# Allegro board EmberMain.brd
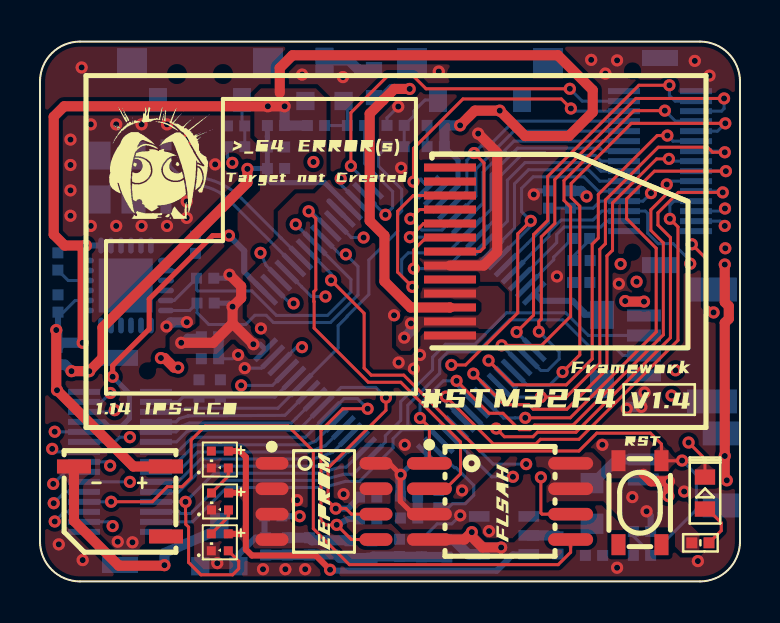
[diagram p0: board, top side]
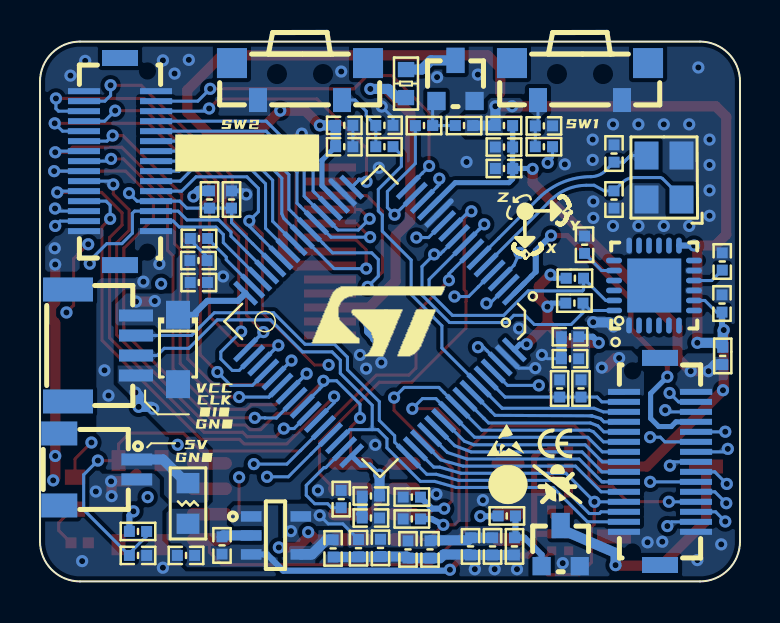
[diagram p1: board, bottom side, seen from below]

Outline 35 x 27 mm; copper layers: TOP, GND, VCC, BOTTOM. Coordinates in mm from the lower left corner of the outline.
Outline path: 0,25 0,2 arc(0.59,0.59) 2,0 33,0 arc(34.41,0.59) 35,2 35,25 arc(34.41,26.41) 33,27 2,27 arc(0.59,26.41) 0,25

## Design rules (mm)
constraint set DEFAULT: min track width 0.152

## Placement (name value [footprint] x y rotation side)
B1  BUZZER  [BUZZER_5X5]  4 4 180 top
C1  0.1uF  [C0402]  25.9 1.8 270 bottom
C2  2.2uF  [C0402]  27.7 1.3 180 bottom
C3  0.1uF  [C0402]  20.35 1.65 90 bottom
C4  2.2uF  [C0402]  19.07 1.66 90 bottom
C5  0.1uF  [C0402]  17.97 1.68 90 bottom
C6  2.2uF  [C0402]  12.37 1.75 90 bottom
C7  0.1uF  [C0402]  13.47 1.75 90 bottom
C8  2.2uF  [C0402]  16.6 1.6 90 bottom
C9  0.1uF  [C0402]  15.5 1.6 90 bottom
C12  20pF  [C0402]  6.3 19.1 90 bottom
C13  20pF  [C0402]  6.3 21.4 270 bottom
C14  2.2uF  [C0402]  18.45 4.27 180 bottom
C15  0.1uF  [C0402]  27.06 14.95 0 bottom
C16  2.2uF  [C0402]  19.79 22.81 0 bottom
C17  0.1uF  [C0402]  18.45 3.17 180 bottom
C18  2.2uF  [C0402]  27.08 16.05 0 bottom
C19  0.1uF  [C0402]  8.5 11.14 180 bottom
C20  2.2uF  [C0402]  8.5 12.24 180 bottom
C21  0.1uF  [C0402]  19.79 21.74 0 bottom
C23  0.1uF  [C0402]  30.1 1.3 180 bottom
C24  0.1uF  [C0402]  7.77 16.84 270 bottom
C25  0.1uF  [C0402]  0.89 16 90 bottom
C26  0.1uF  [C0402]  0.9 13.9 90 bottom
C27  2.2uF  [C0402]  11.8 20.65 180 bottom
C28  0.1uF  [C0402]  11.8 21.73 180 bottom
C29  0.1uF  [C0402]  9.8 22.78 180 bottom
C30  0.1uF  [C0402]  17.78 22.81 180 bottom
C31  2.2uF  [C0402]  27.05 17.15 180 bottom
C32  2.2uF  [C0402]  19.94 4.12 270 bottom
D1  DSK34  [SOD-123FL]  28.1 11.6 270 bottom
D2  Green  [LED0603]  33.25 4.42 90 top
F1  BSMD0805-100-6V  [R0805]  27.6 3.9 270 bottom
FB1  0R  [R0402]  11.8 22.8 0 bottom
FB2  0R  [R0402]  0.86 11.28 90 bottom
J1  1.0 4P SMD  [CON_1-4P-SMD]  31.9 11.8 270 bottom
J2  1.0 2P SMD  [CON_1-2P-SMD]  32.1 5.6 270 bottom
J3  B2B 30P  [B2B-0_5MM-30P]  4 6 270 bottom
J4  B2B 30P  [B2B-0_5MM-30P]  31 21 90 bottom
NOREF  -  []  14.03 20.47 0 top
NOREF#2  -  []  -5.91 4.03 0 top
NOREF#3  -  []  37.49 3.93 0 top
NOREF#4  -  []  26.65 8.41 0 top
NOREF#5  -  []  5.74 21.55 0 top
NOREF#6  -  []  9.25 16.76 0 top
NOREF#7  -  []  -3.82 16.95 0 top
NOREF#8  -  []  13.28 -2.21 0 top
NOREF#9  -  []  7.87 22.77 0 top
NOREF#10  -  []  21.92 22.74 0 top
NOREF#11  -  []  37.91 8.04 0 top
NOREF#12  -  []  -3.43 6.26 0 top
NOREF#13  -  []  29.54 10.71 0 top
NOREF#14  -  []  36.88 7.27 0 top
NOREF#15  -  []  23.75 -2.78 0 top
NOREF#16  -  []  23.84 9.1 0 top
NOREF#17  -  []  39.66 7.12 0 top
NOREF#18  -  []  39.72 4.75 0 top
NOREF#19  -  []  37.56 9.18 0 top
NOREF#20  -  []  38.02 7.14 0 top
NOREF#21  -  []  8.25 18.26 0 top
NOREF#22  -  []  37.83 8.82 0 top
NOREF#23  -  []  14.02 22.05 0 top
NOREF#24  -  []  24.84 26.82 0 top
NOREF#25  -  []  11.72 19.39 0 top
NOREF#26  -  []  6.34 8.65 0 top
NOREF#27  -  []  17.97 12.92 0 top
Q2  AO3402A  [SOT-23]  8.97 1.75 180 bottom
Q3  SS8050  [SOT-23]  14.22 25.02 180 bottom
R1  10R  [R0402]  11.66 3.28 0 bottom
R2  10K  [R0402]  11.28 1.75 90 bottom
R3  4.7K  [R0402]  16.41 4.22 0 bottom
R4  4.7K  [R0402]  16.41 3.12 0 bottom
R5  1K  [R0402]  15.8 22.8 180 bottom
R6  10K  [R0402]  13.8 22.8 0 bottom
R7  10R  [R0603]  16.7 24.9 270 bottom
R8  470R  [R0402]  33.02 1.93 0 top
R9  4.7K(NC)  [R0402]  7.95 9.65 270 bottom
R10  4.7K  [R0402]  9.02 9.65 270 bottom
R11  1K  [R0402]  30.1 2.5 180 bottom
R12  4.7K(NC)  [R0402]  26.52 19.1 270 bottom
R13  4.7K  [R0402]  25.42 19.1 270 bottom
R14  1K  [R0402]  9.8 21.74 0 bottom
R15  1K  [R0402]  17.78 21.74 0 bottom
R16  4.7K  [R0402]  8.28 13.92 0 bottom
R17  4.7K  [R0402]  8.26 15.16 0 bottom
RGB1  WS2812  [RGB1010]  8.99 1.96 0 top
RGB2  WS2812  [RGB1010]  9 4 0 top
RGB3  WS2812  [RGB1010]  8.99 6.1 0 top
S1  K1  [KEY_SMD_3X6]  8 25 180 bottom
S2  K2  [KEY_SMD_3X6]  22 25 180 bottom
S4  KEY-SMD  [KEY_SMD_3X4X2_5]  30 3.94 270 top
U1  AT24C64  [SOP-8]  14.2 4 0 top
U3  TPLP2992IM5X-3.3  [SOT23-5]  23.2 2.3 270 bottom
U4  W25Q128JVSIM  [SOIC-8-208]  23 4 270 top
U5  LCD  [TFT-LCD_13P]  20.5 16.5 180 top
U6  MPU6050  [QFN24-EP-4X4]  4.3 14.8 180 bottom
U7  STM32F405RGT6  [LQFP_64]  18 13 315 bottom
Y1  25Mhz  [CRYSTAL_SMD3225-4P]  3.8 20.2 90 bottom

## Library data of the parts
B1 = BUZZER_NS
C1-C9 C12-C21 C23-C32 = C
D1 = DIODE SCHOTTKY
D2 = LED
F1 = FUSE
FB1 FB2 = L
J1 = CON_6
J2 = CON_4
J3 J4 = CON_2X16
Q2 = MOSFET-N
Q3 = Triode-NPN
R1-R17 = R
RGB1-RGB3 = WS2812
S1 S2 = KEY-SMD-4
S4 = KEY-SMD-4: Tolerance: .TOL; User Part Number: E10S007
U1 = AT24C256C
U3 = TPLP2992IM5X-3.3
U4 = W25Qxxx
U5 = 1.14 TFT-LCD_13P
U6 = MPU6050
U7 = STM32F405RxTx_64
Y1 = CRYSTAL_F

## Footprints (pads in the part's own frame, mm; a bottom-side part is the same pattern mirrored in y, then rotated)
B2B-0_5MM-30P
  rect 0.3x1.6 smd: 1(-3.48,-1.801) 2(-3.48,1.801) 3(-2.979,-1.801) 4(-2.979,1.801) 5(-2.479,-1.801) 6(-2.479,1.801) 7(-1.981,-1.801) 8(-1.981,1.801) 9(-1.481,-1.801) 10(-1.481,1.801) 11(-0.98,-1.801) 12(-0.98,1.801) 13(-0.48,-1.801) 14(-0.48,1.801) 15(0.02,-1.801) 16(0.02,1.801) 17(0.521,-1.801) 18(0.521,1.801) 19(1.021,-1.801) 20(1.021,1.801) 21(1.519,-1.801) 22(1.519,1.801) 23(2.019,-1.801) 24(2.019,1.801) 25(2.52,-1.801) 26(2.52,1.801) 27(3.02,-1.801) 28(3.02,1.801) 29(3.52,-1.801) 30(3.52,1.801)
  rect 0.8x1.801 smd: 31(5.179,0) 32(-5.179,0)
BUZZER_5X5
  rect 1.699x0.701 smd: 1(-2.301,-1.75) 2(2.301,-1.75) 3(-2.301,1.75)
C0402
  rect 0.549x0.549 smd: 1(-0.432,0) 2(0.432,0)
CON_1-2P-SMD
  rect 0.599x1.549 smd: 1(-0.5,1.938) 2(0.5,1.938)
  rect 1.199x1.801 smd: 3(1.801,-1.938) 4(-1.801,-1.938)
CON_1-4P-SMD
  rect 0.599x1.699 smd: 1(-1.501,1.699) 2(-0.5,1.699) 3(0.5,1.699) 4(1.499,1.699)
  rect 1.199x2.499 smd: 5(2.799,-1.699) 6(-2.799,-1.699)
CRYSTAL_SMD3225-4P
  rect 1.399x1.199 smd: 1(-1.1,-0.874) 2(1.1,-0.874) 3(1.1,0.874) 4(-1.1,0.874)
KEY_SMD_3X4X2_5
  rect 1.05x0.7 smd: 1(-2.1,1.075) 2(-2.1,-1.075) 3(2.1,1.075) 4(2.1,-1.075)
KEY_SMD_3X6
  rect 0.899x1.199 smd: 1(-2.101,-0.925) 2(2.101,-0.925)
  rect 1.501x1.501 smd: 3(-3.401,0.925) 4(3.401,0.925)
LED0603
  rect 0.762x1.016 smd: 1(-0.8,0) 2(0.8,0)
LQFP_64
  rect 1.524x0.254 smd: 1(-5.75,3.75) 2(-5.75,3.25) 3(-5.75,2.75) 4(-5.75,2.25) 5(-5.75,1.75) 6(-5.75,1.25) 7(-5.75,0.75) 8(-5.75,0.25) 9(-5.75,-0.25) 10(-5.75,-0.75) 11(-5.75,-1.25) 12(-5.75,-1.75) 13(-5.75,-2.25) 14(-5.75,-2.75) 15(-5.75,-3.25) 16(-5.75,-3.75) 33(5.75,-3.75) 34(5.75,-3.25) 35(5.75,-2.75) 36(5.75,-2.25) 37(5.75,-1.75) 38(5.75,-1.25) 39(5.75,-0.75) 40(5.75,-0.25) 41(5.75,0.25) 42(5.75,0.75) 43(5.75,1.25) 44(5.75,1.75) 45(5.75,2.25) 46(5.75,2.75) 47(5.75,3.25) 48(5.75,3.75)
  rect 0.254x1.524 smd: 17(-3.75,-5.75) 18(-3.25,-5.75) 19(-2.75,-5.75) 20(-2.25,-5.75) 21(-1.75,-5.75) 22(-1.25,-5.75) 23(-0.75,-5.75) 24(-0.25,-5.75) 25(0.25,-5.75) 26(0.75,-5.75) 27(1.25,-5.75) 28(1.75,-5.75) 29(2.25,-5.75) 30(2.75,-5.75) 31(3.25,-5.75) 32(3.75,-5.75) 49(3.75,5.75) 50(3.25,5.75) 51(2.75,5.75) 52(2.25,5.75) 53(1.75,5.75) 54(1.25,5.75) 55(0.75,5.75) 56(0.25,5.75) 57(-0.25,5.75) 58(-0.75,5.75) 59(-1.25,5.75) 60(-1.75,5.75) 61(-2.25,5.75) 62(-2.75,5.75) 63(-3.25,5.75) 64(-3.75,5.75)
QFN24-EP-4X4
  oval 0.279x0.8 smd: 1(-1.25,-1.999) 2(-0.749,-1.999) 3(-0.249,-1.999) 4(0.249,-1.999) 5(0.749,-1.999) 6(1.25,-1.999) 13(1.25,1.999) 14(0.749,1.999) 15(0.249,1.999) 16(-0.249,1.999) 17(-0.749,1.999) 18(-1.242,1.999)
  oval 0.8x0.279 smd: 7(1.999,-1.25) 8(1.999,-0.749) 9(1.999,-0.249) 10(1.999,0.249) 11(1.999,0.749) 12(1.999,1.25) 19(-1.999,1.25) 20(-1.999,0.749) 21(-1.999,0.249) 22(-1.999,-0.249) 23(-1.999,-0.749) 24(-1.999,-1.25)
  rect 2.7x2.7 smd: 25(0.013,0)
R0402
  rect 0.549x0.549 smd: 1(-0.432,0) 2(0.432,0)
R0603
  rect 0.762x0.813 smd: 1(-0.701,0) 2(0.701,0)
R0805
  rect 1.016x1.143 smd: 1(-1.016,0) 2(1.016,0)
RGB1010
  rect 0.45x0.45 smd: 1(0.424,0.424) 2(-0.424,0.424) 3(-0.424,-0.424) 4(0.424,-0.424)
SOD-123FL
  rect 1.399x1.199 smd: 1(1.735,0) 2(-1.735,0)
SOIC-8-208
  oval 0.63x2.25 smd: 1(-1.905,-3.531) 2(-0.635,-3.531) 3(0.635,-3.531) 4(1.905,-3.531) 5(1.905,3.531) 6(0.635,3.531) 7(-0.635,3.531) 8(-1.905,3.531)
SOP-8
  oval 1.651x0.635 smd: 1(-2.601,1.905) 2(-2.601,0.635) 3(-2.601,-0.635) 4(-2.601,-1.905) 5(2.601,-1.905) 6(2.601,-0.635) 7(2.601,0.635) 8(2.601,1.905)
SOT23-5
  rect 0.531x1.031 smd: 1(-0.95,-1.239) 2(0,-1.239) 3(0.95,-1.239) 4(0.95,1.239) 5(-0.95,1.239)
SOT-23
  rect 0.914x0.914 smd: 1(-0.953,-0.991) 2(0.953,-0.991)
  rect 0.914x1.27 smd: 3(0,1.041)
TFT-LCD_13P
  rect 2.601x0.401 smd: 1(0,-4.201) 2(0,-3.5) 3(0,-2.799) 4(0,-2.101) 5(0,-1.399) 6(0,-0.701) 7(0,0) 8(0,0.701) 9(0,1.399) 10(0,2.101) 11(0,2.799) 12(0,3.5) 13(0,4.201)

## Nets
5V: F1.1 J2.1 J3.1 J4.1
5V_F: C1.2 C2.2 F1.2 RGB1.1 RGB2.1 RGB3.1 U3.1 U3.3
GND: C1.1 C2.1 C3.1 C4.1 C5.1 C6.1 C7.1 C8.1 C9.1 C12.1 C13.1 C14.1 C15.1 C16.1 C17.1 C18.1 C19.1 C20.1 C21.1 C23.2 C24.1 C25.2 C26.2 C27.1 C28.1 C29.2 C30.2 C31.1 C32.1 D1.1 J1.4 J2.2 J3.29 J3.30 J4.29 J4.30 Q2.2(S) Q3.2(E) R2.1 R10.1 R13.1 RGB1.3(VSS) RGB2.3(VSS) RGB3.3(VSS) S1.2 S2.1 S4.2 U1.1 U1.2 U1.3 U1.4 U1.7(WP) U3.2 U4.4 U5.8 U5.13 U6.1 U6.9 U6.11 U6.18 U7.12(VSSA) U7.18 U7.63 Y1.2 Y1.4
VBAT: J3.8 U7.1
VCC3V3: B1.1 C4.2 C5.2 C6.2 C7.2 C8.2 C9.2 C14.2 C15.2 C16.2 C17.2 C18.2 C19.2 C20.2 C21.2 C26.1 D1.2 FB1.2 FB2.2 J1.1 J4.2 R3.2 R4.2 R6.1 R8.1 R9.1 R11.1 R12.1 R16.2 R17.2 U1.8 U3.5(VOUT) U4.3(WP#(IO2)) U4.7 U4.8 U5.10(VCC) U5.12 U6.8(VLOGIC) U6.13 U7.19 U7.32 U7.48 U7.64
BEEP: J4.9 R1.2 U7.27
BOOT0: J3.3 R9.2 R10.2 U7.60
IIC1_SCL: J3.18 R17.1 U6.23 U7.8
IIC1_SDA: J3.20 R16.1 U6.24 U7.9
IIC2_SCL: J3.11 R3.1 U1.6 U7.56
IIC2_SDA: J3.13 R4.1 U1.5 U7.55
KEY1: J3.10 R14.1 U7.2
KEY2: J3.5 R15.1 U7.59
NRST: C23.1 J3.16 R11.2 S4.1 U7.7
OSCIN: C12.2 U7.5 Y1.1
OSCOUT: C13.2 U7.6 Y1.3
PA0: J3.26 U7.14
PA1: J3.28 R5.1 U7.15
PA2: J4.27 U7.16
PA3: J4.25 U7.17
PA4: J4.23 U5.7 U7.20
PA5: J4.21 U5.4 U7.21
PA6: J4.19 U5.5 U7.22
PA7: J4.17 U5.3 U7.23
PA8: J4.12 U4.1 U7.41
PA9: J4.10 U7.42
PA10: J4.8 U7.43
PA11: J4.6 U7.44
PA12: J4.4 U7.45
PA13: J1.3 J3.27 U7.46
PA14: J1.2 J3.25 U7.49
PA15: J3.23 RGB1.4 U7.50
PB0: J4.11 U7.26
PB2: D2.2(CATHODE) J4.7 R12.2 R13.2 U7.28
PB5: J3.9 U7.57
PB6: J3.7 U7.58
PB8: J3.4 U7.61
PB9: J3.6 U7.62
PB10: J4.5 U4.6 U7.29
PB11: J4.3 U7.30
PB12: J4.28 U7.33
PB13: J4.26 U7.34
PB14: J4.24 U7.35
PB15: J4.22 U7.36
PC2: J3.22 U4.2 U7.10
PC3: J3.24 U4.5 U7.11
PC4: J4.15 U5.6 U7.24
PC5: J4.13 U7.25
PC6: J4.20 U7.37
PC7: J4.18 U7.38
PC8: J4.16 U7.39
PC9: J4.14 U7.40
PC10: J3.21 U7.51
PC11: J3.19 U7.52
PC12: J3.17 U7.53
PC14: J3.12 U7.3
PC15: J3.14 U7.4
PD2: J3.15 U7.54
TFT_LEDK: R7.2 U5.11
VREF: C27.2 C28.2 FB1.1 FB2.1 J3.2 U7.13
N790000: C3.2 U3.4
N791178: Q2.1 R1.1 R2.2
N791348: B1.2 Q2.3
N798251: Q3.1 R5.2 R6.2
N799665: RGB1.2 RGB2.4
N799734: RGB2.2 RGB3.4
N800609: D2.1 R8.2
N818576: C24.2 U6.20
N819365: C25.1 U6.10
N839751: C29.1 R14.2 S1.1
N839755: C30.1 R15.2 S2.2
N848388: Q3.3 R7.1
N871638: C31.2 U7.31
N871692: C32.2 U7.47

Pads without a net: B1 3; J1 5 6; J2 3 4; J3 31 32; J4 31 32; RGB3 2; S1 3 4; S2 3 4; S4 3 4; U5 1 2 9; U6 2 3 4 5 6 7 12 14 15 16 17 19 21 22 25

## Via types
v1: diameter 0.61, hole 0.305, TOP to BOTTOM, 181 vias

## Routing (per net, layer and track width the routed paths; a pad name or vN(x,y) marks a point on that pad's centre or on a via; arc(x,y) is an arc through that point)
5V: length 47.3
  TOP w0.508: v1(6.05,11.17) 6.23,11.17 6.71,10.69 v1(6.91,10.69)
  VCC w0.254: 31.63,12.3 31.54,12.3
  VCC w0.508: v1(31.58,9.3) 31.58,10.37 31.77,10.56 ; 31.77,10.56 31.63,10.7 31.63,14.48 31.12,14.99 v1(29.83,14.99) 29.83,15.08 v1(29.03,15.88) 27.71,17.2 23.98,17.2 18.19,22.99 14.06,22.99 5.56,14.49 5.56,11.66 v1(6.05,11.17) ; 31.77,10.56 v1(31.78,10.56)
  BOTTOM w0.254: 6.38,9.48 J3.1 ; 30.64,6.1 J2.1
  BOTTOM w0.508: F1.1 27.66,4.92 28.85,6.1 J2.1
5V_F: length 22.3
  TOP w0.305: RGB3.1 9.99,6.52 10.29,6.22 10.29,4.44 ; RGB2.1 9.44,4.44 10.29,4.44 ; 10.29,4.44 10.29,2.38 ; 10.29,2.38 10.29,1.6 10.6,1.3 13.79,1.3 v1(14.5,0.58) ; 10.29,2.38 RGB1.1
  BOTTOM w0.305: v1(14.5,0.58) 14.55,0.54 22.84,0.54 23.37,1.07 23.37,1.07 23.64,1.35 U3.3
GND: length 77.7
  TOP w0.508: v1(31.42,4.27) 31.42,4.98 v1(31.45,5) 30.56,5 30.18,5.38 ; v1(21.91,22.4) 22.86,21.45 22.86,16.48 22.18,15.8 U5.8 ; v1(23.06,1.7) 22.13,1.7 21.59,2.24 v1(21.59,2.46) 21.22,2.09 U4.4
  VCC w0.508: v1(12.86,4.06) 12.01,4.06 v1(8.86,0.91) ; 13.94,1.68 13.94,1.3 v1(13.26,0.61) v1(12.27,0.61) v1(11.15,0.61) 9.17,0.61 v1(8.86,0.91) ; 13.94,1.68 20.8,1.68 v1(21.59,2.46) ; 13.94,1.68 13.97,1.71 13.97,3.87 14.03,3.92 14.03,3.96 14.47,4.4 15.1,4.4 15.14,4.36 v1(15.18,4.36) 17.65,6.83 v1(18.24,6.83) ; v1(0.94,1.85) 1.96,1.85 2.13,1.68 v1(2.13,1.07) 2.97,1.07 v1(3.89,1.99) 4.59,1.99 v1(4.62,1.96) 5.11,2.44 6.13,2.44 7.17,1.4 8.38,1.4 v1(8.86,0.91)
  BOTTOM w0.152: 9.64,11.14 C19.1 ; C31.1 27.48,17.07 26.64,16.23 C18.1 ; C21.1 C16.1 ; v1(17.91,23.75) 17.35,23.18 C30.2 ; 11.63,11.23 11.07,10.67 v1(10.24,10.67)
  BOTTOM w0.254: 19.77,19.37 19.77,19.37 20.44,20.04 ; v1(24.69,19.35) 24.87,19.53 R13.1 ; C17.1 19.08,3.37 ; 14.45,19.02 U7.12 14.45,19.02
  BOTTOM w0.508: R2.1 C6.1 C7.1 13.5,1.35 14.82,1.35 15,1.17 C9.1 C8.1 16.68,1.24 C5.1 17.99,1.23 C4.1 19.09,1.22 C3.1 ; U3.2 25.83,2.3 C1.1 ; v1(29.34,8.64) 29.43,8.73 v1(30.07,8.73) 30.07,9.29 v1(30.23,9.45) ; C20.1 C19.1 ; v1(7.34,12.97) 7.33,12.95 6.53,12.95 v1(6.32,12.75) ; C17.1 C14.1
  vias: v1(1.52,22.1) v1(1.52,20.83) v1(1.52,19.56) v1(1.52,18.29) v1(2.08,25.7) v1(2.54,22.86) v1(2.54,17.78) v1(3.81,22.86) v1(3.81,17.78) v1(5.08,22.86) v1(5.08,17.78) v1(6.35,22.86) v1(6.35,17.78) v1(7.34,19) v1(7.34,18.18) v1(7.37,22.1) v1(7.37,21.08) v1(8.76,20.86) v1(9.91,11.33) v1(11.05,12.65) v1(13.11,25.35) v1(13.67,20.98) v1(15.15,25.22) v1(17.7,13.31) v1(17.93,10.95) v1(18.06,20.69) v1(18.69,10.64) v1(19,11.33) v1(19.94,25.5) v1(21.1,4.55) v1(25.85,15.25) v1(27.56,26.09) v1(28.12,6.83) v1(28.27,25.4) v1(28.85,26.06) v1(28.94,14.89) v1(28.85,0.69) v1(32.21,4.5) v1(32.74,26.04) v1(32.89,1.02) v1(33.48,25.3)
VBAT: length 18.6
  TOP w0.254: v1(9.45,17.3) 8.64,17.3 5.46,14.12 5.46,12.62 3.63,10.79 v1(3.63,10.24)
  BOTTOM w0.254: U7.1 10.43,15.27 10.43,15.27 10.21,15.49 ; v1(3.63,10.24) 4.47,9.4 4.47,8.15 4.06,7.75 3.43,7.75 3.2,7.98 J3.8
  BOTTOM w0.305: v1(9.45,17.3) 10.21,16.54 10.21,15.49
VCC3V3: length 152.5
  TOP w0.254: U4.3 18.66,3.36 18.01,4.01 18.01,5.31 v1(18.03,5.33) 17.46,5.9 U1.8
  TOP w0.508: B1.1 4.66,5.75 v1(0.85,9.56) 0.81,9.6 v1(0.81,12.57) ; 9.63,12.9 v1(10.67,11.86) ; 9.63,12.9 v1(9.63,13.74) 10.06,14.17 10.06,14.76 v1(9.47,15.34) ; 9.63,12.9 8.66,11.93 v1(7.06,11.93) ; v1(2.13,11.93) 2.13,16.64 v1(2.3,16.8) 1.23,16.8 0.69,17.35 0.69,23.24 1.21,23.76 v1(11.39,23.76) v1(12.23,23.76) ; 11.99,24.43 11.99,25.68 12.62,26.31 25.89,26.31 27.64,24.57 27.64,23.47 26.44,22.28 24.26,22.28 v1(22.99,23.55) 21.74,23.55 v1(21.01,22.81) ; v1(34.34,5.05) 34.24,5.16 v1(34.24,6.27) 34.24,12.94 34.44,13.14 34.44,13.77 34.24,13.97 v1(34.24,15.85) ; v1(29.26,14.02) 29.29,14 v1(30.2,14)
  GND w0.508: v1(34.24,15.85) 34.24,16.64 v1(34.26,16.66) 34.26,15.88 v1(34.24,15.85) ; v1(34.24,15.85) 32.98,14.59 30.79,14.59 ; 30.79,14.59 30.79,16.66 28.2,19.25 v1(27.33,19.25) ; 30.79,14.59 v1(30.2,14) ; v1(18.03,5.33) 10.9,5.33 8.08,8.15 8.08,10.92 v1(7.06,11.93) v1(2.13,11.93)
  VCC w0.508: 34.32,5.18 34.32,6.2 v1(34.24,6.27) ; 34.32,5.18 34.34,5.16 v1(34.34,5.05) ; 34.32,5.18 34.29,5.21
  BOTTOM w0.152: C4.2 19.86,2.88 20.59,2.88 v1(21.01,3.3) ; C26.1 1.17,13.47 1.76,14.05 U6.8 ; J4.2 33.45,17.52
  BOTTOM w0.254: U7.64 11.01,11.86 v1(10.67,11.86) ; C21.2 20.9,21.06 20.9,19.79 U7.19 ; R17.2 9.3,15.16 v1(9.47,15.34) ; v1(18.03,5.33) 18.52,5.82 18.95,5.82 U7.48 ; R16.2 9.45,13.92 v1(9.63,13.74)
  BOTTOM w0.305: R6.1 13.25,22.92 ; D1.2 27.22,13.33 27.22,13.44 26.63,14.03 25.1,14.03 U7.32 ; v1(0.81,12.57) 0.9,12.66 C26.1 ; U6.13 v1(2.3,16.8) ; R11.1 30.53,3.3 v1(30.33,3.51) ; v1(7.06,11.93) 7.36,12.24 C20.2
  BOTTOM w0.508: C21.2 C16.2 v1(21.01,22.81) ; v1(0.81,12.57) 0.86,12.52 FB2.2 1.09,11.93 v1(2.13,11.93) ; v1(12.23,23.76) FB1.2 R6.1 ; v1(18.03,5.33) 18.02,5.32 C14.2 ; 29.26,14.02 v1(29.26,14.02) ; C6.2 C7.2 13.6,2.06 15.47,2.06 C9.2 ; R12.1 27.05,19.53 v1(27.33,19.25) ; v1(18.55,12.9) 18.55,12.53 v1(18.21,12.19) ; 28.13,13.3 D1.2
  vias: v1(22.45,2.51) v1(29.62,4.22)
BEEP: length 31.3
  TOP w0.152: v1(20.57,10.83) 21.28,10.83 23.89,13.43 23.89,17.38 v1(24.54,18.03)
  VCC w0.152: v1(12.98,3.26) 13.44,3.72 13.44,4.45 19.82,10.83 v1(20.57,10.83)
  BOTTOM w0.152: J4.9 27.92,19.52 27.2,20.24 24.66,20.24 24.08,19.66 24.08,18.49 v1(24.54,18.03) 24.54,17.77 23.97,17.2 U7.27
  BOTTOM w0.305: v1(12.98,3.26) 12.11,3.26 R1.2
BOOT0: length 7.4
  BOTTOM w0.152: J3.3 6.91,8.98 7.15,9.22 R9.2 R10.2 11.75,9.22 U7.60
IIC1_SCL: length 43.7
  VCC w0.152: v1(12.79,17.86) 15.32,15.33 15.32,11.09 9.81,5.59 4.28,5.59 3.89,5.21 0.99,5.21 v1(0.66,4.88)
  BOTTOM w0.152: J3.18 1.26,5.48 v1(0.66,4.88) ; v1(12.79,17.86) 13.05,17.6 ; 13.05,17.6 15.54,15.1 15.54,14.47 14.38,13.3 11.82,13.3 10.59,14.53 7.88,14.53 7.82,14.58 R17.1 6.71,14.05 U6.23 ; 13.05,17.6 13.05,17.6 U7.8
IIC1_SDA: length 36.7
  VCC w0.152: v1(4.49,4.98) 9.7,4.98 15.67,10.95 15.67,15.98 v1(15.29,16.36)
  BOTTOM w0.152: U7.9 14.84,16.51 14.84,16.51 15,16.36 v1(15.29,16.36) 15.9,15.75 15.9,14.33 14.52,12.95 11.67,12.95 11.31,13.31 10.74,13.31 10.28,12.85 8.44,12.85 7.85,13.44 R16.1 7.48,13.55 U6.24 ; J3.20 v1(4.49,4.98)
IIC2_SCL: length 23.3
  TOP w0.152: U1.6 15.57,3.36 15.3,3.64 v1(14.79,3.64) 14.4,4.03 14.4,5.66 17.3,8.56 v1(17.3,9.19)
  BOTTOM w0.152: v1(17.3,9.19) 16.79,9.7 15.05,9.7 14.79,9.44 14.79,9.44 U7.56 12.92,7.56 7.53,7.56 7.34,7.49 6.83,6.98 J3.11
  BOTTOM w0.305: R3.1 15.4,3.64 v1(14.79,3.64)
IIC2_SDA: length 23.5
  TOP w0.152: U1.5 15.57,2.09 v1(14.84,2.83) 14.26,2.83 14.05,3.05 14.05,7.54 15.14,8.64 v1(16.38,8.64)
  BOTTOM w0.152: v1(16.38,8.64) 15.88,9.14 15.2,9.14 U7.55 13.27,7.21 7.61,7.21 6.88,6.48 J3.13
  BOTTOM w0.305: R4.1 15.42,3.12 v1(14.84,2.83)
KEY1: length 29.8
  GND w0.152: v1(9.62,20.93) 9.62,19.85 11.61,17.86 11.61,14.79 12.14,14.26 12.32,14.26 v1(12.68,13.9)
  VCC w0.152: v1(0.74,7.49) 1.23,7.98 10.19,7.98 13.82,11.61 13.82,12.77 v1(12.68,13.9)
  BOTTOM w0.152: v1(9.62,20.93) 9.62,20.97 9.37,21.22 R14.1 ; v1(12.68,13.9) 12.5,13.9 ; 12.5,13.9 12.5,13.9 12.44,13.96 ; 12.5,13.9 U7.2 ; v1(0.74,7.49) 0.74,7.48 J3.10
KEY2: length 22.4
  BOTTOM w0.152: R15.1 16.93,21.32 16.93,20.76 18.08,19.61 18.08,18.53 17.88,18.33 17.88,17.52 16.44,16.08 16.44,14.35 15.35,13.27 15.35,13.24 14.91,12.79 14.91,11.67 U7.59 11.89,8.66 7.3,8.66 6.83,8.48 5.8,8.48 J3.5
NRST: length 52.7
  TOP w0.152: v1(32.11,6.05) 32.1,6.04 S4.1 31.07,6.87 30.52,7.42 27.84,7.42 26.95,6.52 21.98,6.52 18.19,10.32 16.56,10.32 16.21,10.67 16.21,13.41 v1(14.55,15.06)
  VCC w0.152: v1(3.51,5.79) 3.87,6.15 9.87,6.15 14.96,11.24 14.96,14.66 v1(14.55,15.06)
  BOTTOM w0.152: v1(14.55,15.06) 14.55,15.39 14.4,15.54 14.39,15.54 U7.7 ; v1(3.51,5.79) 3.32,5.98 J3.16 ; v1(32.11,6.05) 32.82,5.33 32.82,3.59 C23.1 30.53,1.4 29.67,2.27 R11.2
OSCIN: length 12.1
  BOTTOM w0.152: U7.5 9.44,19.08 arc(8.64,19.62) 7.69,19.81 7.29,19.81 6.78,19.53 C12.2 5.88,19.95 arc(5.6,20.13) 5.28,20.2 4,20.2 arc(3.93,20.19) 3.87,20.15 2.93,19.2 Y1.1
OSCOUT: length 10.8
  BOTTOM w0.152: 5.82,20.97 C13.2 6.72,20.55 arc(7.06,20.32) 7.46,20.24 arc(8.87,19.96) 10.07,19.16 12.06,17.17 U7.6 ; 5.82,20.97 5.81,20.97 5.48,21.3 ; 5.82,20.97 5.48,21.3 ; 5.48,21.3 Y1.3
PA0: length 33.4
  VCC w0.152: v1(0.74,3) 1.35,3 1.7,3.35 6.49,3.35 7.36,2.49 8.83,2.49 16.76,10.42 16.76,17.65 15.04,19.38 v1(15.04,20.14)
  BOTTOM w0.152: v1(0.74,3) 1.22,3.48 J3.26 ; U7.14 15.15,19.74 15.04,19.86 v1(15.04,20.14)
PA1: length 33.6
  VCC w0.152: v1(3.63,2.77) 4.24,2.77 4.47,3 6.34,3 7.21,2.13 8.98,2.13 17.12,10.28 17.12,17.58 17.27,17.73 v1(17.27,18.34)
  BOTTOM w0.152: R5.1 16.23,20.9 17.63,19.5 17.63,18.7 v1(17.27,18.34) 17.26,18.34 U7.15 ; J3.28 3.42,2.98 v1(3.63,2.77)
PA2: length 19.1
  TOP w0.152: v1(26.49,24.64) 19.3,24.64 18.64,25.3 17.4,25.3 15.54,23.44 v1(15.54,20.78)
  BOTTOM w0.152: v1(15.54,20.78) 15.54,20.76 15.88,20.42 15.88,20.42 U7.16 ; v1(26.49,24.64) 27.11,24.02 J4.27
PA3: length 15
  TOP w0.152: v1(18.67,19.99) 18.67,21.66 21.15,24.13 26.07,24.13 v1(26.54,23.65)
  BOTTOM w0.152: 19.05,20.11 19.05,20.08 19.42,19.72 ; 19.05,20.11 18.8,20.11 v1(18.67,19.99) ; 19.05,20.11 19.05,20.08 U7.17 ; J4.25 26.68,23.52 v1(26.54,23.65)
PA4: length 18.1
  TOP w0.152: U5.7 22,16.5 22.2,16.7 22.2,20.93 v1(21.7,21.42)
  BOTTOM w0.152: 20.47,18.66 21.26,19.44 21.26,19.44 21.35,19.53 21.35,21.07 v1(21.7,21.42) 22.06,21.78 22.45,21.78 23.69,23.02 J4.23
PA5: length 15.9
  TOP w0.152: v1(18.52,18.14) 18.98,18.6 U5.4
  BOTTOM w0.152: v1(18.52,18.14) 19.08,17.58 20.1,17.58 U7.21 21.58,19.05 21.79,19.27 21.79,20.62 23.69,22.52 J4.21
PA6: length 15.9
  TOP w0.152: v1(18.49,17.22) 19.18,17.9 U5.5
  BOTTOM w0.152: J4.19 28.14,22.02 23.7,22.02 22.15,20.47 22.15,18.92 22,18.77 U7.22 20.45,17.22 v1(18.49,17.22)
PA7: length 23.1
  TOP w0.152: v1(18.62,14.73) 17.88,15.47 17.88,18.52 18.66,19.3 U5.3
  BOTTOM w0.152: v1(18.62,14.73) 18.08,15.27 18.08,16.1 18.41,16.43 20.37,16.43 20.85,16.91 20.85,16.91 U7.23 22.33,18.39 22.56,18.61 22.56,20.35 23.88,21.67 27.99,21.67 28.14,21.52 J4.17
PA8: length 30.1
  TOP w0.152: v1(31.34,19.85) 31.34,19.38 30.54,18.59 30.54,17.56 31.17,16.93 31.17,12.33 26.65,7.82 24.73,7.82 24.5,7.59 23.97,7.59 23.15,8.41 22.45,8.41 v1(20.83,10.03) ; U4.1 19.47,7.7 v1(19,8.18)
  BOTTOM w0.152: v1(31.34,19.85) 31.5,20.02 J4.12 ; v1(19,8.18) 19,8.86 20.17,10.03 v1(20.83,10.03) 20.83,9.82 21.03,9.62 21.03,9.62 U7.41
PA9: length 24.1
  TOP w0.152: v1(22.81,7.65) 23.22,7.24 24.65,7.24 24.87,7.46 26.8,7.46 31.52,12.18 31.52,17.2 30.9,17.82 30.9,18.44 31.92,19.46 v1(34.14,19.46)
  BOTTOM w0.152: v1(22.81,7.65) 22.29,7.65 U7.42 ; v1(34.14,19.46) 34.07,19.52 J4.10
PA10: length 24.6
  TOP w0.152: v1(31.49,18.14) 31.9,17.73 31.9,12.06 26.95,7.11 25.02,7.11 24.79,6.88 22.66,6.88 v1(20.29,9.25)
  BOTTOM w0.152: J4.8 31.7,19.02 31.49,18.82 v1(31.49,18.14) ; v1(20.29,9.25) 20.29,8.94 U7.43
PA11: length 27.3
  VCC w0.152: v1(34.25,18.65) 33.27,17.68 33.27,15.57 32.72,15.01 32.72,8.97 28.3,4.55 24.79,4.55 24.31,5.03 v1(24.31,5.87)
  BOTTOM w0.152: v1(24.31,5.87) 22.66,5.87 21.98,6.55 U7.44 ; J4.6 32.8,18.52 34.12,18.52 v1(34.25,18.65)
PA12: length 27.2
  VCC w0.152: v1(23.65,5.23) 23.65,4.62 24.08,4.19 28.44,4.19 33.07,8.82 33.07,14.87 33.63,15.42 33.63,17.17 v1(34.24,17.78)
  BOTTOM w0.152: J4.4 34,18.02 v1(34.24,17.78) ; v1(23.65,5.23) 22.58,5.23 21.45,6.37 20.47,7.34
PA13: length 32.6
  BOTTOM w0.152: 18.39,7.59 19.52,7.59 U7.46 ; 18.39,7.59 18.11,7.59 17.65,7.14 17.65,6.68 15.98,5 15.27,5 14.19,4.7 9.34,4.7 7.63,2.98 J3.27 ; 18.39,7.59 18.39,8.81 19.98,10.41 19.98,11.07 20.4,11.48 21.87,11.48 23.47,13.08 26.14,13.08 27.56,11.66 28.79,11.66 29.15,11.3 J1.3
PA14: length 30.8
  BOTTOM w0.152: 16.06,5.76 17.27,6.97 17.27,7.28 18.03,8.05 18.03,8.99 19.63,10.59 19.63,11.22 20.27,11.86 21.75,11.86 23.32,13.44 26.28,13.44 27.42,12.3 J1.2 ; 16.06,5.76 15.66,5.36 15.19,5.36 14.07,5.05 9.2,5.05 7.54,3.4 7.03,3.4 6.95,3.48 J3.25 ; 16.06,5.76 16.58,6.28 U7.49
PA15: length 18.5
  TOP w0.152: RGB1.4 9.94,1.01 9.94,0.64 9.63,0.33 8.05,0.33 7.43,0.95 7.43,2.72 7.29,2.86 7.29,3.35 7.27,3.36 v1(7.27,3.98)
  BOTTOM w0.152: U7.50 16.23,6.63 15.31,5.72 15.01,5.72 13.95,5.41 8.7,5.41 v1(7.27,3.98) J3.23
PB0: length 9.8
  BOTTOM w0.152: J4.11 27.99,20.02 27.41,20.59 24.43,20.59 23.72,19.89 23.72,17.66 U7.26
PB2: length 25.8
  TOP w0.152: v1(32.59,16.86) 33.32,16.13 33.32,13.81 v1(33.68,13.45) ; D2.2 33.25,6.13 v1(32.43,6.95)
  GND w0.152: v1(32.59,16.86) 32.59,17.86 31.47,18.99 30.98,18.99 v1(30.55,19.42)
  VCC w0.152: v1(33.68,13.45) 33.68,8.2 v1(32.43,6.95)
  BOTTOM w0.152: v1(30.55,19.42) 30.15,19.02 J4.7 28.01,19.02 27.66,18.67 R12.2 R13.2 25.42,17.95 24.37,16.89 U7.28
PB5: length 8.6
  BOTTOM w0.152: J3.9 6.81,7.48 7.11,7.78 7.48,7.92 12.57,7.92 12.8,8.15 U7.57
PB6: length 8.2
  BOTTOM w0.152: J3.7 6.8,7.98 6.97,8.15 7.4,8.28 7.41,8.28 7.48,8.28 12.25,8.31 12.47,8.53 12.47,8.53 U7.58
PB8: length 11.1
  VCC w0.152: v1(3.52,9.42) 4.19,9.42 4.57,9.04 9.3,9.04 v1(10.06,9.8)
  BOTTOM w0.152: J3.4 3.07,8.98 3.52,9.42 v1(3.52,9.42) ; U7.61 11.62,9.8 v1(10.06,9.8)
PB9: length 13.7
  VCC w0.152: v1(13.1,11.72) 9.95,8.57 v1(3.74,8.57)
  BOTTOM w0.152: J3.6 2.2,8.48 3.61,8.48 3.69,8.57 v1(3.74,8.57) ; v1(13.1,11.72) 12.83,11.72 12.64,11.53 U7.62
PB10: length 31.1
  TOP w0.152: v1(25.04,5.21) 25.04,3.42 25.1,3.36 U4.6
  VCC w0.152: v1(32.51,15.89) 32.51,15.38 32.36,15.23 32.36,9.12 28.45,5.21 v1(25.04,5.21)
  BOTTOM w0.152: 29.2,18.52 J4.5 29.2,18.52 ; 29.2,18.52 28.09,18.52 27.65,18.08 26.06,18.08 25.45,17.47 25.45,17.27 24.64,16.45 24.63,16.45 U7.29 ; 29.2,18.52 30.27,18.52 30.38,18.41 30.38,17.42 30.9,16.89 31.66,16.89 32.51,16.04 v1(32.51,15.89)
PB11: length 6.6
  BOTTOM w0.152: J4.3 28.33,18.02 28.04,17.72 26.2,17.72 25.83,17.35 25.83,16.95 U7.30
PB12: length 20.9
  TOP w0.152: v1(23.83,12.47) 24.68,13.32 24.68,17.35 25.38,18.06 25.38,20.25 29.95,24.82 v1(31.47,24.82)
  BOTTOM w0.152: J4.28 31.76,24.02 31.47,24.31 v1(31.47,24.82) ; 24.72,11.58 v1(23.83,12.47) 23.83,12.47 U7.33
PB13: length 23.9
  TOP w0.152: v1(24.94,12.5) 24.94,13 25.06,13.13 25.06,17.23 25.74,17.91 25.74,20.1 29.79,24.16 v1(34.2,24.16)
  BOTTOM w0.152: v1(34.2,24.16) 34.2,23.65 34.08,23.52 J4.26 ; v1(24.94,12.5) 25.96,11.48 25.96,11.13 25.38,10.55 25.05,10.55 U7.34
PB14: length 21.9
  TOP w0.152: v1(23.08,11.81) 25.08,11.81 26.53,13.26 26.53,18.72 26.2,19.06 26.2,20.05 29.7,23.55 v1(31.24,23.55)
  BOTTOM w0.152: 24.01,10.88 v1(23.08,11.81) U7.35 ; v1(31.24,23.55) 31.77,23.02 J4.24
PB15: length 23.6
  TOP w0.152: v1(34.26,22.91) 29.57,22.91 26.56,19.9 26.56,19.2 26.99,18.77 26.99,11.33 v1(26.13,10.47)
  BOTTOM w0.152: v1(34.26,22.91) 33.87,22.52 J4.22 ; v1(26.13,10.47) 25.46,9.8 24.38,9.8 U7.36
PC2: length 49.9
  TOP w0.152: U4.2 20.28,4.63 21.03,5.38 21.03,6.97 18.04,9.96 16.41,9.96 13.71,12.67 13.71,13.99 13.69,14.01 13.69,14.49 13.79,14.59 13.79,18.15 v1(13.43,18.51)
  VCC w0.152: v1(13.43,18.51) 13.96,18.51 16.05,16.42 16.05,10.77 9.95,4.67 9.89,4.67 9.85,4.62 5.43,4.62 5.2,4.39 4.16,4.39 3.88,4.67 1.44,4.67 v1(0.69,3.91)
  BOTTOM w0.152: J3.22 1.26,4.48 v1(0.69,3.91) ; U7.10 13.55,18.51 v1(13.43,18.51)
PC3: length 57.7
  TOP w0.152: v1(3.56,3.99) 5.61,3.99 6.37,4.74 7.11,4.74 7.56,5.19 7.56,7.07 8.27,7.78 12.4,7.78 13.67,6.52 13.67,2.64 15.47,0.84 25.91,0.84 26.53,1.46 U4.5
  VCC w0.152: v1(16.18,17.2) 16.41,16.97 16.41,10.57 8.96,3.13 7.22,3.13 6.64,3.71 4.34,3.71 4.06,3.99 v1(3.56,3.99)
  BOTTOM w0.152: v1(3.56,3.99) 3.55,3.98 J3.24 ; U7.11 15.57,17.2 15.57,17.2 v1(16.18,17.2)
PC4: length 17.1
  TOP w0.152: v1(18.69,15.65) 18.69,16.59 19.3,17.2 20.5,17.2 U5.6
  BOTTOM w0.152: v1(18.69,15.65) 20.29,15.65 21.21,16.56 21.21,16.56 U7.24 22.81,18.17 22.91,18.4 22.91,20.17 24.05,21.31 27.76,21.31 28.05,21.02 J4.15
PC5: length 10
  BOTTOM w0.152: U7.25 23.37,18.01 23.37,20.07 24.25,20.95 27.62,20.95 28.04,20.52 J4.13
PC6: length 22
  TOP w0.152: v1(22.43,11.05) 23.65,9.83 26.31,9.83 27.61,11.13 27.61,16.87 27.91,17.17 27.91,19.35 30.86,22.3 v1(31.37,22.3)
  BOTTOM w0.152: J4.20 31.65,22.02 v1(31.37,22.3) ; U7.37 v1(22.43,11.05)
PC7: length 23.8
  TOP w0.152: v1(34.24,21.46) 33.63,21.46 33.38,21.72 30.91,21.72 28.27,19.08 28.27,16.89 27.99,16.61 27.99,10.9 26.31,9.22 v1(25.04,9.22)
  BOTTOM w0.152: v1(25.04,9.22) 23.55,9.22 ; 23.55,9.22 U7.38 23.55,9.22 ; v1(34.24,21.46) 34.18,21.52 J4.18
PC8: length 24.4
  TOP w0.152: v1(31.45,21.13) 30.83,21.13 28.63,18.93 28.63,16.56 28.35,16.28 28.35,10.62 26.34,8.61 24.66,8.61 24.43,8.84 23.22,8.84 22.03,10.03 v1(21.67,10.39)
  BOTTOM w0.152: v1(31.45,21.13) 31.56,21.02 J4.16 ; v1(21.67,10.39) 21.67,10.39 U7.39 v1(21.67,10.39)
PC9: length 25
  TOP w0.152: v1(24.26,8.18) 26.51,8.18 30.81,12.48 30.81,16.66 29.33,18.14 29.33,19.13 30.72,20.52 v1(34.29,20.52)
  BOTTOM w0.152: v1(24.26,8.18) 23.76,8.18 23.75,8.18 23.18,8.18 U7.40 ; J4.14 v1(34.29,20.52)
PC10: length 11
  BOTTOM w0.152: U7.51 15.88,6.99 14.97,6.08 13.85,5.77 8.22,5.77 6.94,4.48 J3.21
PC11: length 10.6
  BOTTOM w0.152: J3.19 6.9,4.98 8.04,6.12 13.64,6.12 14.63,6.45 15.52,7.34 U7.52
PC12: length 10.2
  BOTTOM w0.152: U7.53 14.26,6.79 13.44,6.48 7.9,6.48 6.9,5.48 J3.17
PC14: length 21.8
  VCC w0.152: v1(4.49,7.21) 9.93,7.21 14.25,11.54 14.25,13.21 v1(11.02,16.43)
  BOTTOM w0.152: U7.3 11.31,15.8 v1(11.02,16.43) ; v1(4.49,7.21) 3.99,7.21 3.75,6.98 J3.12
PC15: length 23.1
  VCC w0.152: v1(0.61,6.63) 9.84,6.63 14.61,11.39 14.61,13.92 v1(14.27,14.25)
  BOTTOM w0.152: J3.14 0.76,6.48 v1(0.61,6.63) ; v1(14.27,14.25) 13.57,14.25 13.08,14.74 13.08,14.74 U7.4
PD2: length 9.8
  BOTTOM w0.152: U7.54 13.78,7.01 13.31,6.83 7.74,6.83 6.88,5.98 J3.15
TFT_LEDK: length 17
  TOP w0.508: U5.11 18.53,13.7 17.22,15.01 17.22,17.3 16.48,18.03 16.48,23.39 17.15,24.06 17.15,24.06 17.72,24.63 v1(18.48,24.63)
  BOTTOM w0.508: R7.2 17.15,24.2 17.58,24.63 v1(18.48,24.63)
VREF: length 23.6
  TOP w0.508: v1(1.57,10.52) v1(2.46,10.52) 3.12,11.18 3.12,12.7 10.37,19.95 v1(10.37,20.63)
  BOTTOM w0.152: 11.37,22.27 11.37,22.21 11.37,22.2
  BOTTOM w0.254: C27.2 C28.2 11.37,22.27 11.37,22.27 FB1.1 ; C27.2 11.37,20.12 11.55,19.94 14.24,19.94 U7.13 ; C27.2 10.39,20.65 v1(10.37,20.63)
  BOTTOM w0.508: v1(1.57,10.52) 1.24,10.85 FB2.1
N790000: length 1.9
  BOTTOM w0.508: U3.4 21.41,1.35 20.68,2.08 C3.2
N791178: length 3.4
  BOTTOM w0.305: Q2.1 9.92,1.33 10.77,2.18 R2.2 11.23,2.24 R1.1
N791348: length 12
  TOP w0.508: v1(6.22,0.81) 6.2,0.79 3.94,0.79 1.7,3.03 B1.2
  BOTTOM w0.508: Q2.3 8.97,2.62 6.22,1.42 v1(6.22,0.81)
N798251: length 2.4
  BOTTOM w0.152: R6.2 R5.2 15.37,23.84 Q3.1
N799665: length 1.6
  TOP w0.152: RGB1.2 9.42,3.24 RGB2.4
N799734: length 1.6
  TOP w0.152: RGB2.2 9.42,5.26 RGB3.4
N800609: length 2.4
  TOP w0.152: R8.2 34.06,2.54 34.06,2.93 33.38,3.62 D2.1
N818576: length 1.8
  BOTTOM w0.152: C24.2 6.91,15.55 U6.20
N819365: length 1.6
  BOTTOM w0.152: U6.10 1.41,15.05 C25.1
N839751: length 2.4
  BOTTOM w0.152: S1.1 10.1,22.92 C29.1 R14.2
N839755: length 3.4
  BOTTOM w0.152: S2.2 19.25,24.08 18.69,23.52 18.69,23.29 C30.1 R15.2
N848388: length 2.7
  BOTTOM w0.508: R7.1 15.91,25.6 15.45,26.06 Q3.3
N871638: length 3.3
  BOTTOM w0.152: U7.31 25.69,16.09 25.69,16.22 C31.2
N871692: length 5.2
  BOTTOM w0.152: U7.47 20.71,5.69 20.8,5.69 21.69,4.81 21.69,4.31 21.26,3.89 20.62,3.89 20.42,3.69 C32.2

## Copper pours and planes (outline as drawn; the poured copper is in the pictures)
5V on BOTTOM: 28.35,17.75 30.12,17.75 30.25,17.63 30.25,16.64 30.02,16.41 30.02,15.37 30.23,15.16 31.95,15.16 32.18,14.94 32.18,5.97 31.8,5.59 29.21,5.59 28.8,5.18 28.8,4.34 28.4,3.94 26.7,3.94 26.57,4.06 26.57,6.58 27.23,7.24 28.7,7.24 31.32,9.86 31.32,13.74 31.11,13.94 29.13,13.94 28.22,14.86 28.22,17.63
5V on BOTTOM: 4.9,9.25 7.14,9.25 7.29,9.4 7.29,11.28 7.01,11.56 5.44,11.56 5.08,11.2 5.08,10.74 4.8,10.46 4.8,9.35
5V_F on BOTTOM: 26.85,3.63 28.47,3.63 28.68,3.43 28.68,2.13 28.45,1.91 27.94,1.91 27.74,1.7 27.74,0.81 27.64,0.71 23.32,0.71 23.04,0.99 23.04,3.73 23.11,3.81 25.27,3.81 25.45,3.63 25.45,2.92 25.25,2.72 23.88,2.72 23.72,2.57 23.72,1.96 23.8,1.88 26.39,1.88 26.72,2.21 26.72,3.51
GND on TOP: 0.25,25 0.77,26.23 2,26.75 33,26.75 34.23,26.23 34.75,25 34.75,2 34.23,0.77 33,0.25 2,0.25 0.77,0.77 0.25,2 ; 26 cut-outs
GND on BOTTOM: 34.75,2 34.23,0.77 33,0.25 2,0.25 0.77,0.77 0.25,2 0.25,25 0.77,26.23 2,26.75 33,26.75 34.23,26.23 34.75,25 ; 15 cut-outs
GND on GND: 34.75,2 34.23,0.77 33,0.25 2,0.25 0.77,0.77 0.25,2 0.25,25 0.77,26.23 2,26.75 33,26.75 34.23,26.23 34.75,25
VCC3V3 on TOP: 19.2,14.78 22.89,14.78 23.24,14.43 23.24,13.26 22.61,12.62 19.1,12.62 18.82,12.34 18.82,11.86 18.49,11.53 18.06,11.53 17.81,11.79 17.81,12.98 18.19,13.36 21.92,13.36 22.07,13.51 22.07,13.92 21.95,14.05 19.15,14.05 19.02,14.17 19.02,14.61
VCC3V3 on TOP: 6.71,11.38 8.84,11.38 9.55,12.09 9.75,12.09 10.52,11.33 11.07,11.33 11.28,11.53 11.28,12.01 10.13,13.16 10.13,15.27 10.77,15.9 10.77,16.33 11.68,17.25 11.68,18.57 12.73,19.61 13.64,19.61 14.33,20.29 14.33,24.13 13.79,24.66 11.05,24.66 10.72,24.33 10.72,22.28 11,22 11,19.56 9.88,18.44 9.88,17.12 7.98,15.21 7.98,12.83 7.75,12.6 6.88,12.6 6.48,12.19 6.48,11.61
VCC3V3 on TOP: 32.97,2.39 32.49,2.87 32.49,3.84 31.37,4.95 28.37,4.95 28.07,5.26 28.07,5.99 27.61,6.45 23.7,6.45 21.18,3.94 18.49,3.94 18.16,4.27 18.16,6.05 18.19,6.07 17.53,6.73 16.03,6.73 15.39,6.1 15.39,5.44 15.67,5.16 17.48,5.16 17.73,4.9 17.73,3 18.14,2.59 21.92,2.59 22.35,2.16 23.62,2.16 25.48,4.01 28.17,4.01 29.48,2.71 31.43,2.71 31.75,2.39 31.75,1.75 32.11,1.4 32.87,1.4 32.97,1.5
VCC3V3 on BOTTOM: 11,23.42 11.66,23.42 11.86,23.22 11.86,22.35 11.91,22.3 13.67,22.3 13.82,22.45 13.82,23.27 13.69,23.39 12.78,23.39 12.65,23.52 12.65,23.98 12.45,24.18 11,24.18 10.87,24.05 10.87,23.55
VCC3V3 on BOTTOM: 17.3,1.68 19.53,1.68 19.63,1.78 19.63,2.54 19.86,2.77 21.13,2.77 21.31,2.59 21.31,2.24 21.56,1.98 22.73,1.98 22.89,2.13 22.89,3.76 22.76,3.89 19.63,3.89 19.51,3.76 19.51,2.87 19.41,2.77 18.49,2.77 18.44,2.82 18.44,4.83 18.36,4.9 16.66,4.9 16.41,4.65 16.41,2.9 16.1,2.59 14.15,2.59 13.97,2.77 12.04,2.77 11.84,2.57 11.84,1.85 11.94,1.75 14.91,1.75 15.06,1.6 17.22,1.6
VCC3V3 on BOTTOM: 28.4,14.4 30.68,14.4 31.22,13.87 31.22,12.9 31.11,12.8 29.26,12.8 28.85,12.4 27.38,12.4 27.08,12.7 27.08,16.46 27.15,16.54 27.79,16.54 28.17,16.15 28.17,14.63
VCC3V3 on BOTTOM: 31.9,17.78 33.71,17.78 34.75,16.74 34.75,15.62 34.62,15.49 33.17,15.49 33.02,15.65 33.02,16.28 32.18,17.12 31.98,17.12 31.83,17.27 31.83,17.7
VCC3V3 on BOTTOM: 7.65,9.68 8.31,9.68 8.46,9.83 8.46,12.65 8.33,12.78 7.62,12.78 7.49,12.65 7.49,9.83
VCC3V3 on VCC: 0.25,25 0.77,26.23 2,26.75 33,26.75 34.23,26.23 34.75,25 34.75,2 34.23,0.77 33,0.25 2,0.25 0.77,0.77 0.25,2 ; 12 cut-outs
VREF on BOTTOM: 1.17,9.22 3.12,9.22 3.23,9.32 3.23,10.31 2.9,10.64 2.9,11.15 2.64,11.4 0.84,11.4 0.61,11.18 0.61,9.78
N790000 on BOTTOM: 19.86,1.7 20.6,1.7 21.23,1.07 21.23,0.91 21.31,0.84 22.81,0.84 22.91,0.94 22.91,1.68 22.73,1.85 21.49,1.85 21.11,2.24 21.11,2.59 20.98,2.72 19.99,2.72 19.79,2.51 19.79,1.78

Small or netless copper shapes (teardrops, artwork), in the pictures only: 76 on TOP, 259 on BOTTOM, 5 on GND, 38 on VCC
